# Altium PCB Pumpkin Letter Template.PcbDoc
Units mil, origin at the board's own origin, x right, y up, seen from the top; angles counter-clockwise.
Board outline 3775 x 3550 mil, 4 copper layers (TOP Copper, Inner Layer 1, Inner Layer 2, BOT Copper), stack 61.2 mil thick; 5 components, 127 nets, 128 pads, 0 vias.
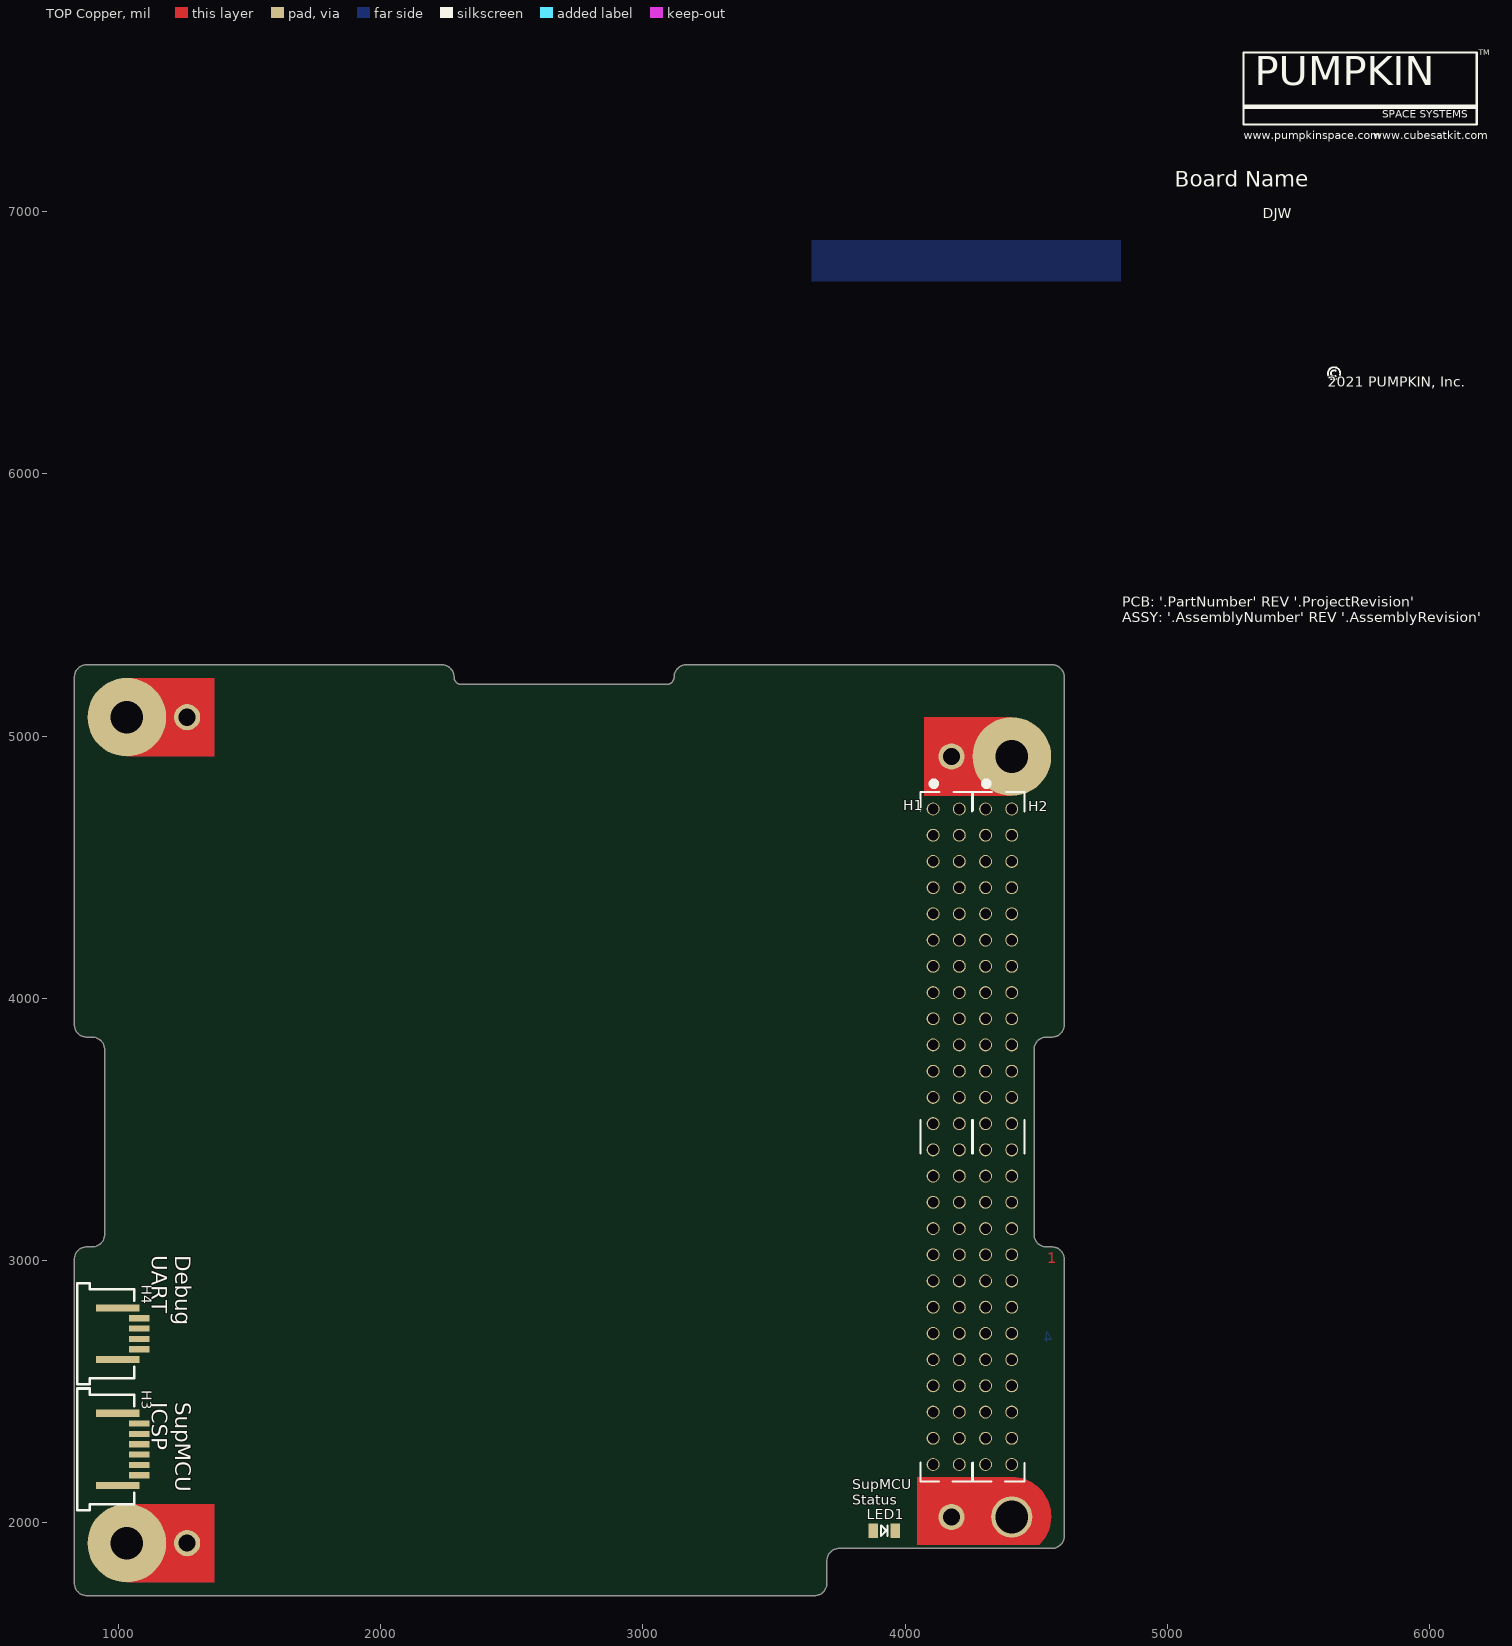
[diagram p0: TOP Copper view]
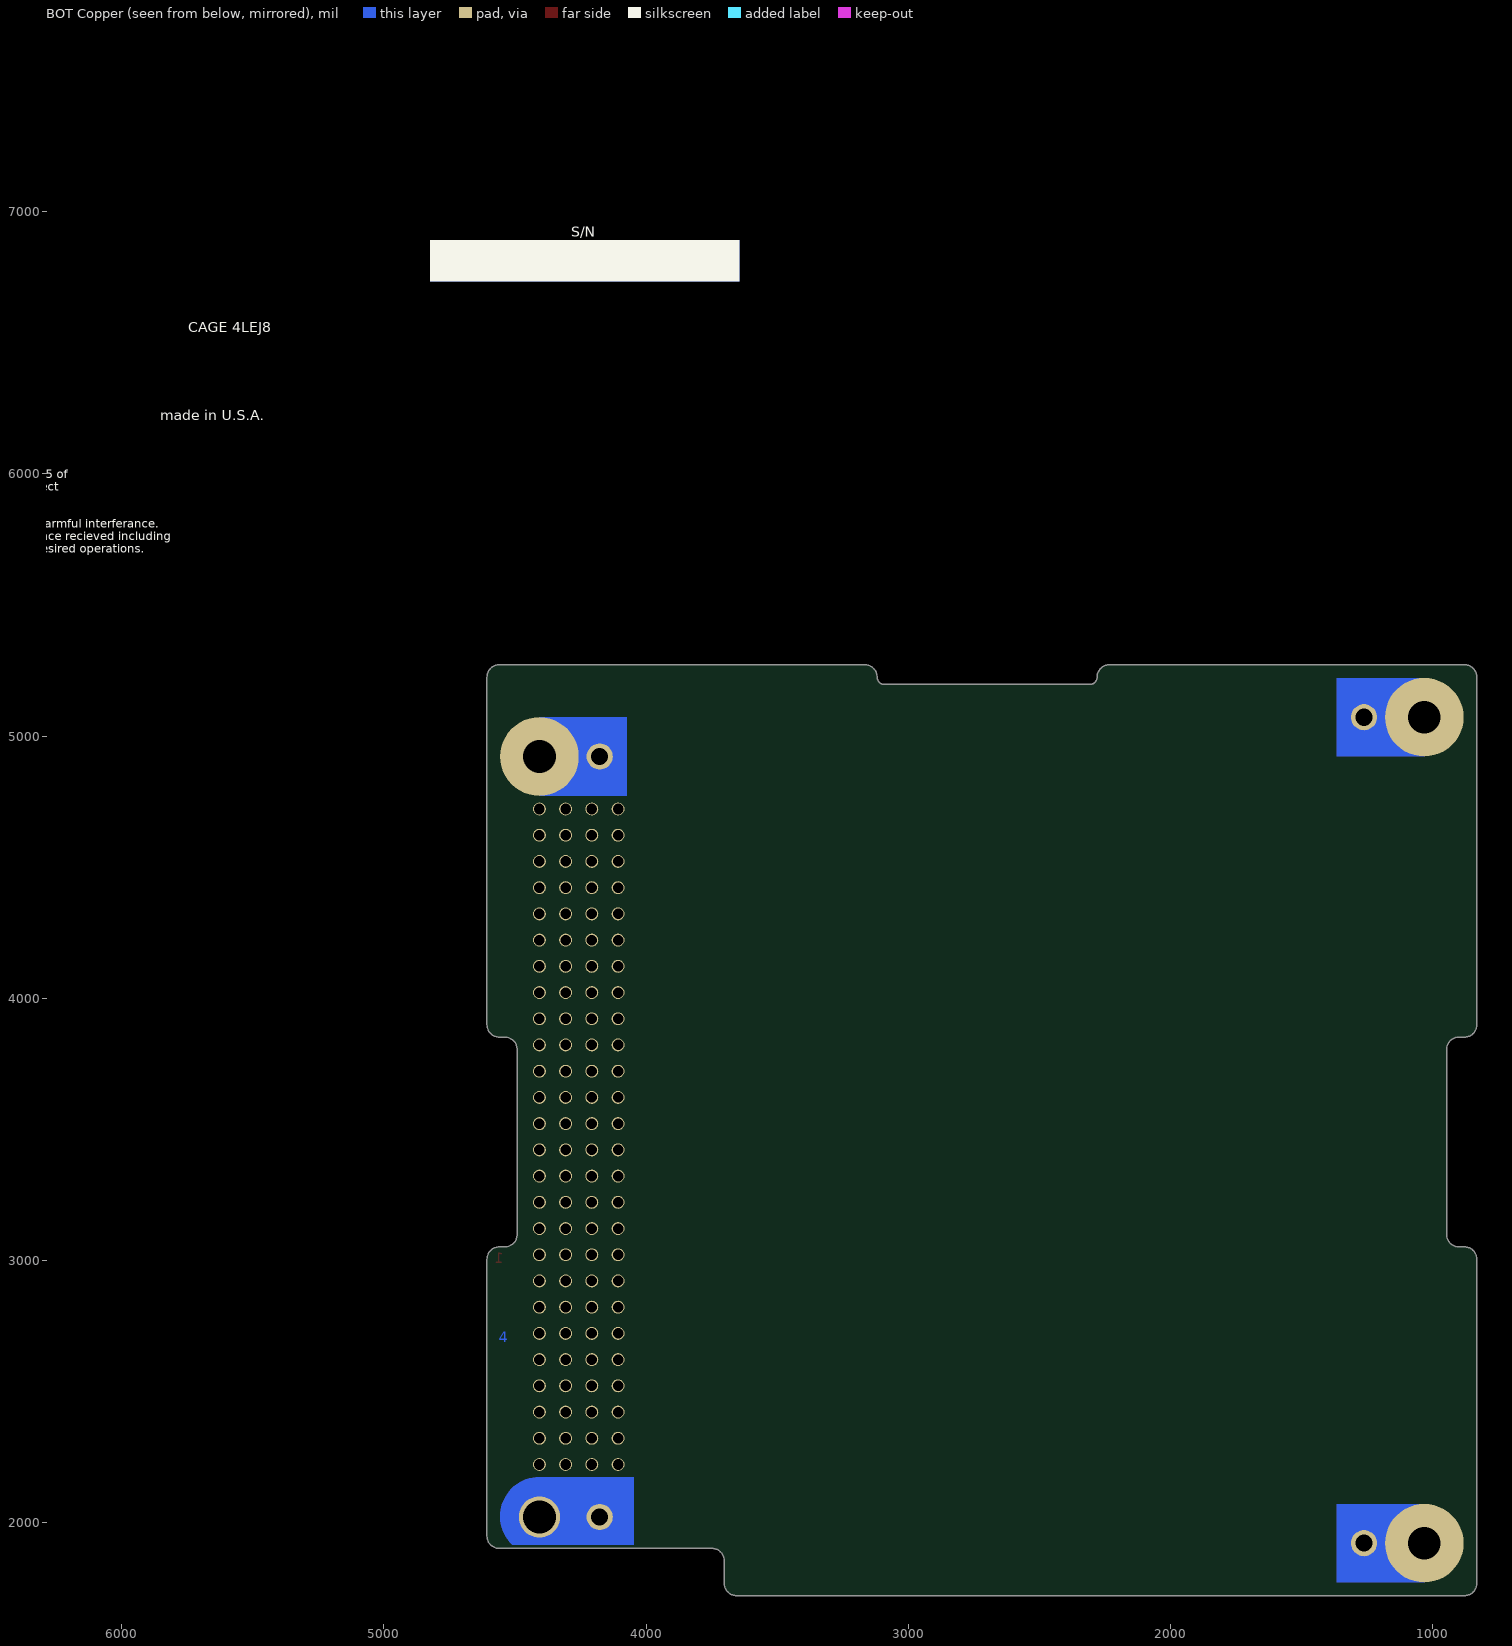
[diagram p1: BOT Copper view, seen from below]
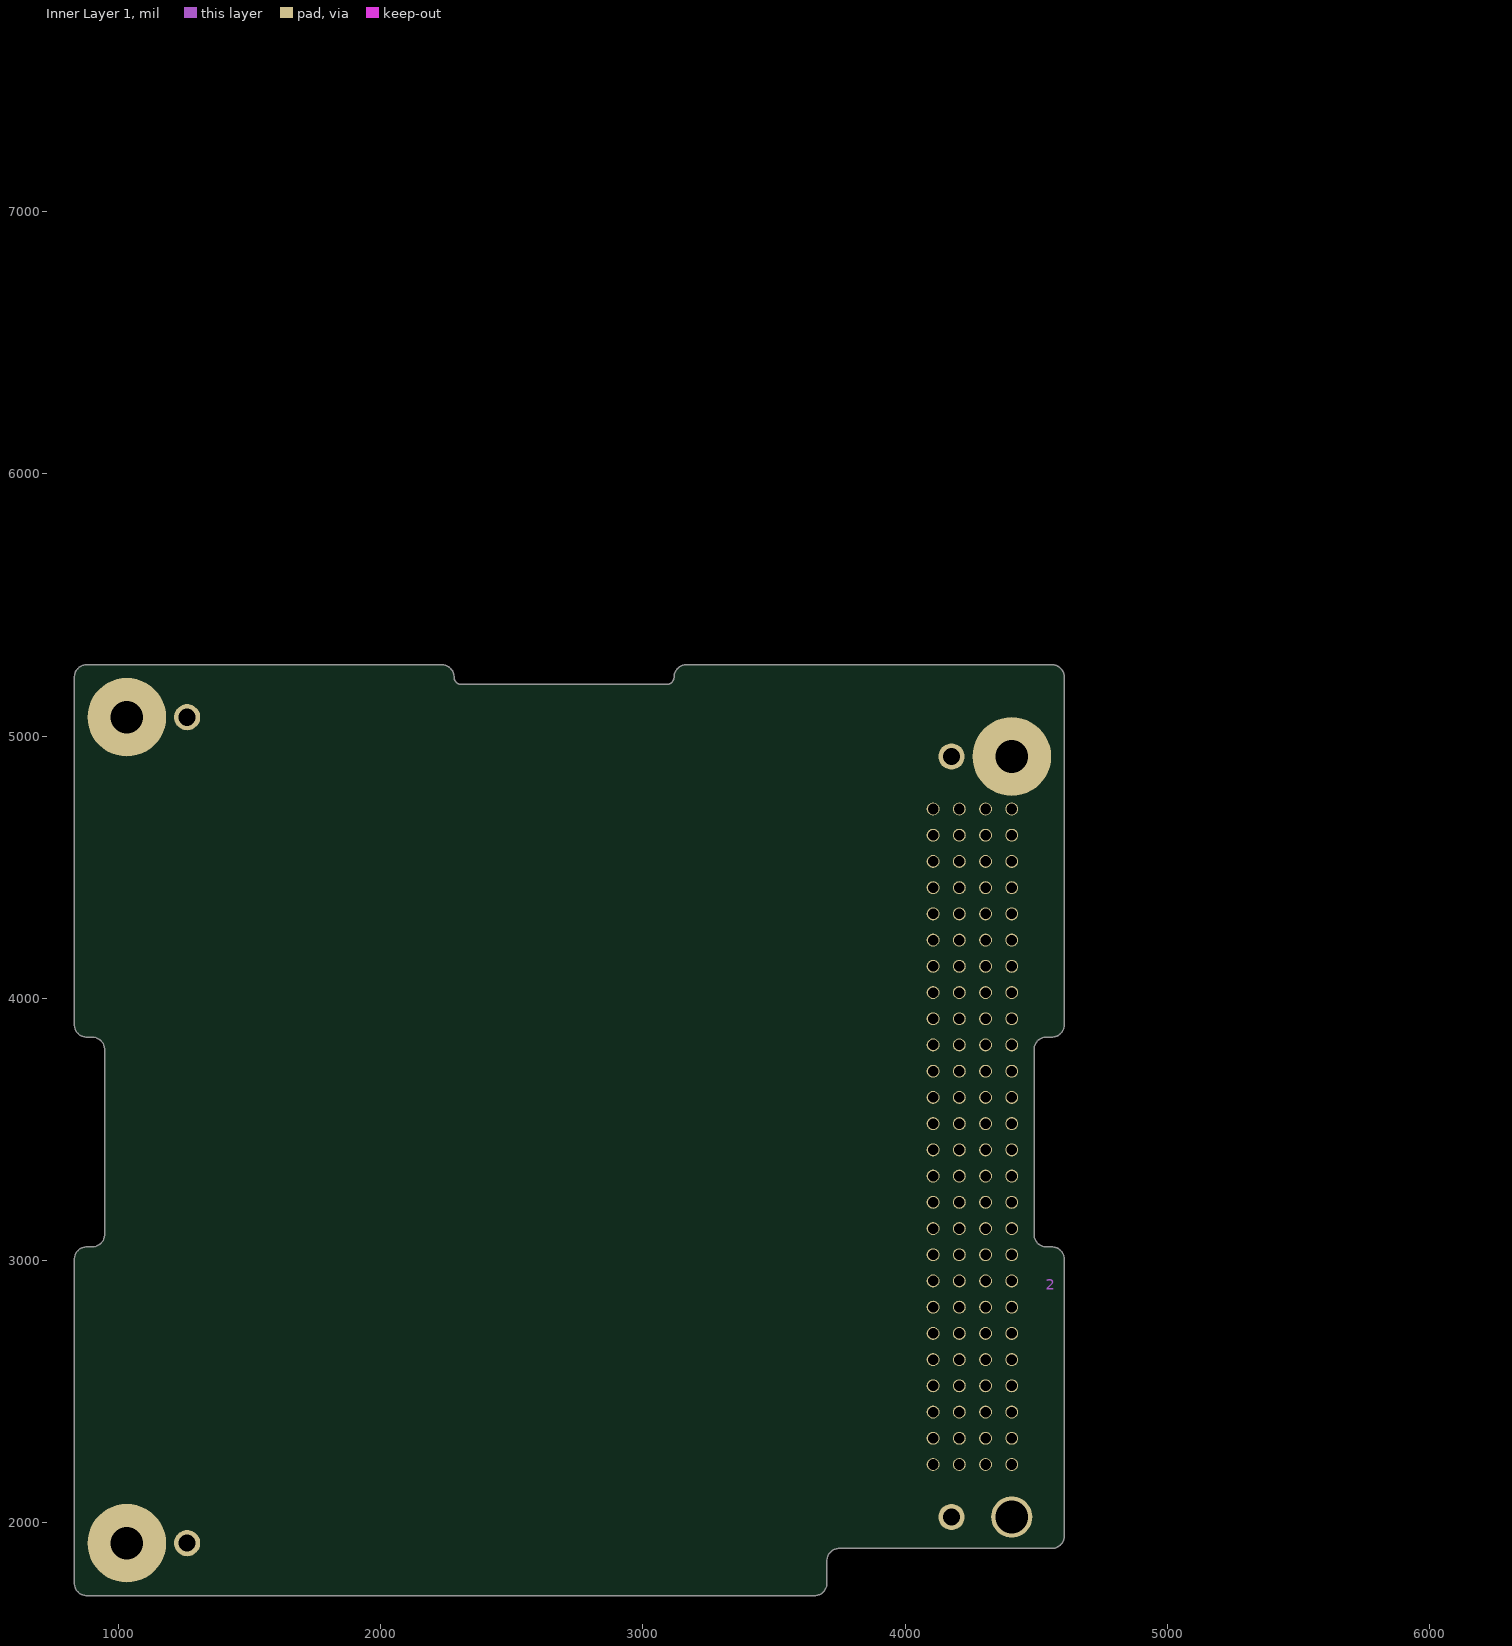
[diagram p2: Inner Layer 1]
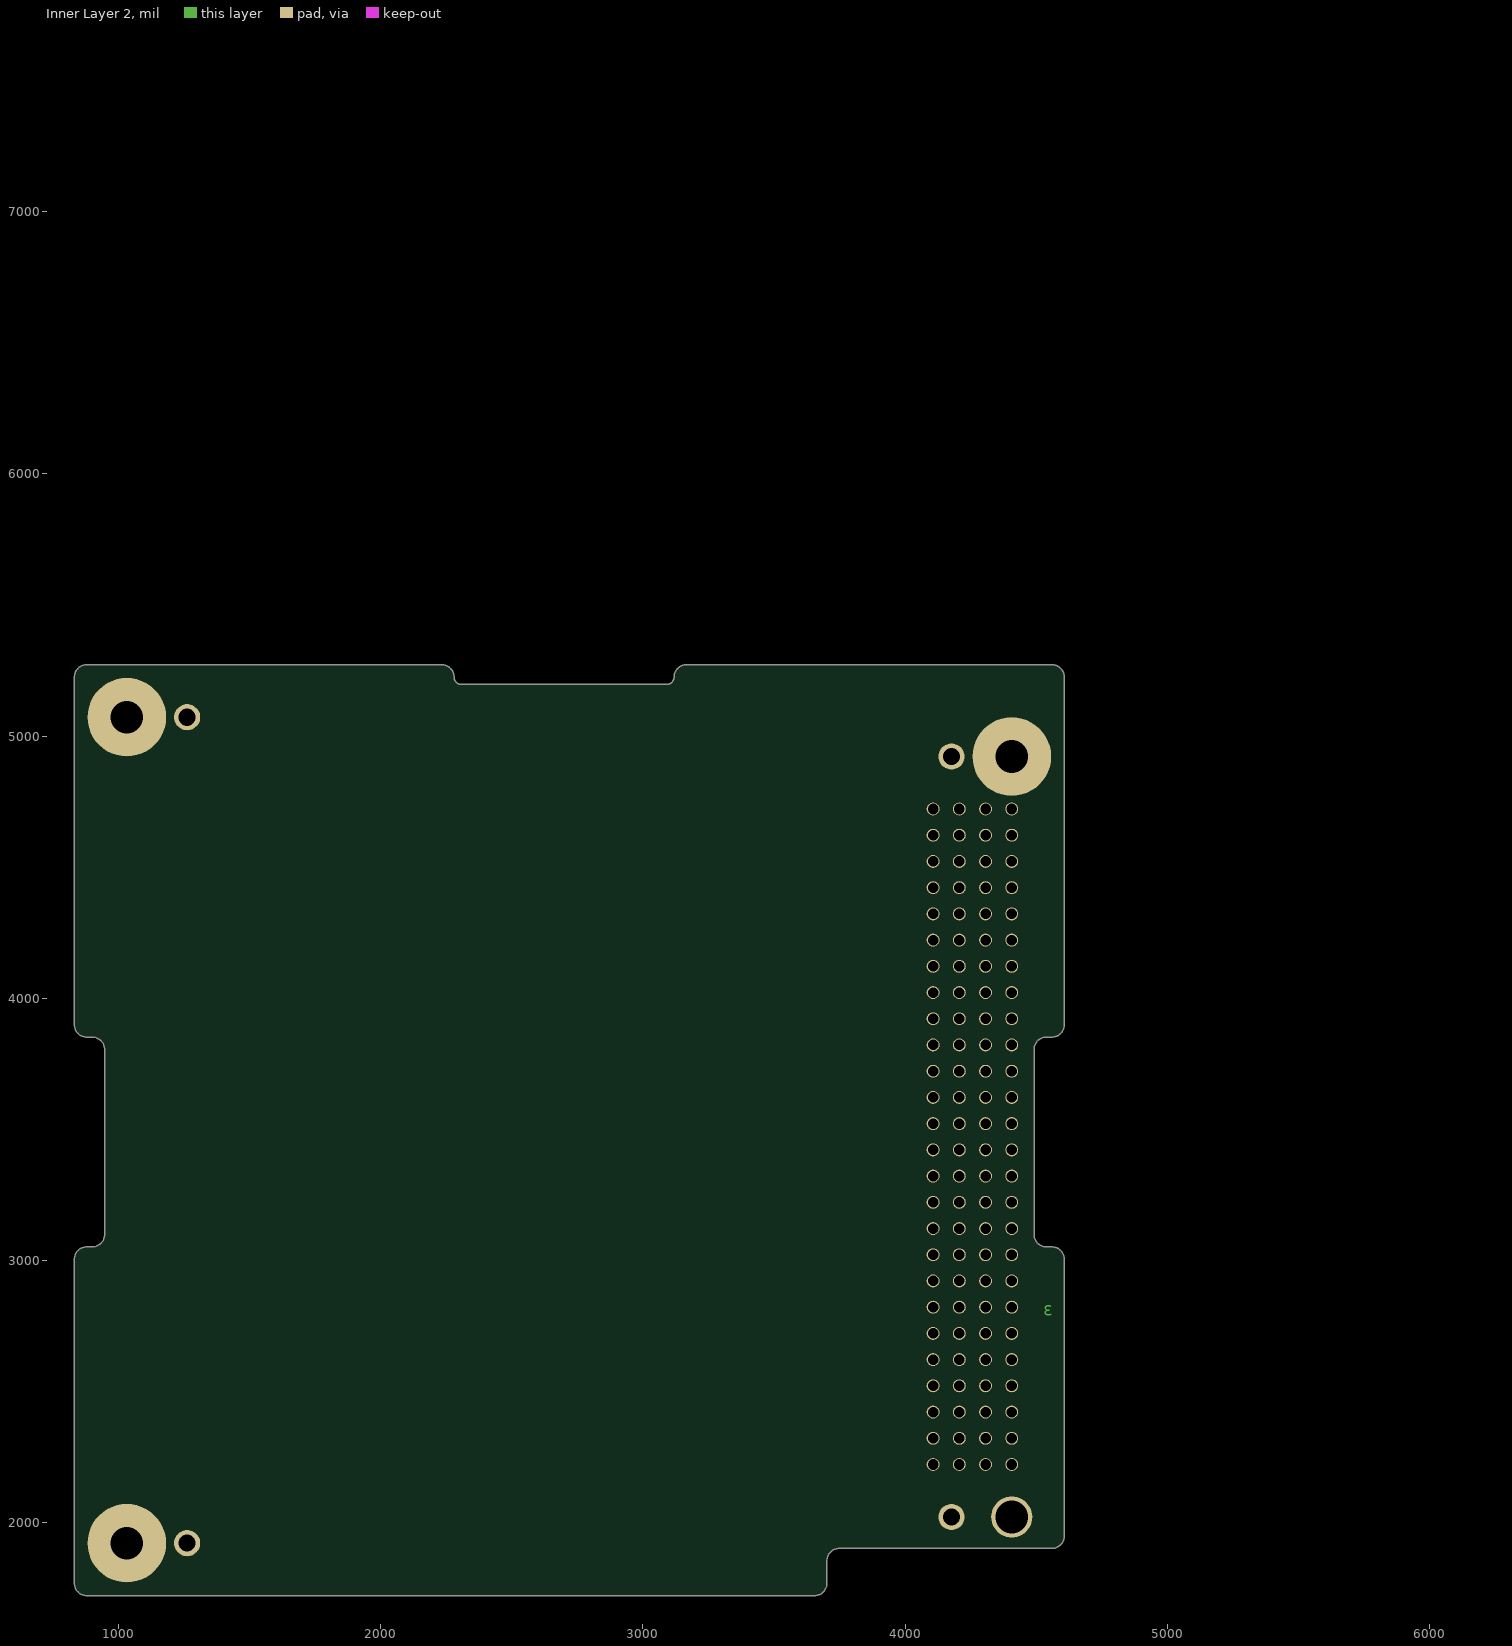
[diagram p3: Inner Layer 2]

## Layer stack, top to bottom
Top Solder: solder mask 0.4, Solder Resist, Dk 3.5
TOP Copper: signal copper 1.4
Dielectric 1: core 8, FR-4, Dk 4.8
Inner Layer 1: signal copper 1.417
Dielectric 3: prepreg 37.566, Dk 4.2
Inner Layer 2: signal copper 1.417
Dielectric 2: core 10, Dk 4.2
BOT Copper: signal copper 1.4
Bottom Solder: solder mask 0.4, Solder Resist, Dk 3.5

## Board outline
832,1769 832,3005 cw(c879,3005) 879,3052 900,3052 ccw(c900,3099) 947,3099 947,3805 ccw(c900,3805) 900,3852 879,3852 cw(c879,3899) 832,3899 832,5225 cw(c879,5225) 879,5272 2233,5272 cw(c2233,5225) 2280,5225 ccw(c2308,5225) 2308,5197 3091,5197 ccw(c3091,5225) 3119,5225 cw(c3166,5225) 3166,5272 4560,5272 cw(c4560,5225) 4607,5225 4607,3899 cw(c4560,3899) 4560,3852 4539,3852 ccw(c4539,3805) 4492,3805 4492,3099 ccw(c4539,3099) 4539,3052 4560,3052 cw(c4560,3005) 4607,3005 4607,1949 cw(c4560,1949) 4560,1902 3749,1902 ccw(c3749,1855) 3702,1855 3702,1769 cw(c3655,1769) 3655,1722 879,1722 cw(c879,1769)

## Design rules (kind name [scope] priority, off if disabled: settings)
BoardOutlineClearance [All] p1: gap=10 ignorepadtopadclearanceinfootprint=FALSE
Clearance Clearance_1 [HasFootprint('Spark_Gap') vs inPolygon] p1: gap=8 ignorepadtopadclearanceinfootprint=FALSE except(0: Arc-Hole Track-Hole SMDPad-Hole THPad-Hole Via-Hole Fill-Hole Poly-Hole Region-Hole Text-Hole)
Clearance Clearance_3 [HasFootprint('Spark_Gap')] p2: gap=6 ignorepadtopadclearanceinfootprint=FALSE except(0: Arc-Hole Track-Hole SMDPad-Hole THPad-Hole Via-Hole Fill-Hole Poly-Hole Region-Hole Text-Hole)
Clearance Clearance_2 [InNet('BAT_POS')   and not      HasFootprint('Spark_Gap')] p3: gap=8 ignorepadtopadclearanceinfootprint=FALSE except(0: Arc-Hole Track-Hole SMDPad-Hole THPad-Hole Via-Hole Fill-Hole Poly-Hole Region-Hole Text-Hole)
Clearance Polygon_Clearence [All vs OnLayer('Keep-Out Layer')] p4: gap=10 ignorepadtopadclearanceinfootprint=FALSE except(0: Arc-Hole Track-Hole SMDPad-Hole THPad-Hole Via-Hole Fill-Hole Poly-Hole Region-Hole Text-Hole)
Clearance [All] p5: gap=8 ignorepadtopadclearanceinfootprint=FALSE except(0: Arc-Hole Track-Hole SMDPad-Hole THPad-Hole Via-Hole Fill-Hole Poly-Hole Region-Hole Text-Hole)
ComponentClearance [All] p1: gap=10 collisioncheckmode=3 verticalgap=1.97 showdistances=FALSE
HoleSize [All] p1: absolutevalues=TRUE maxlimit=314.96 minlimit=1 maxpercent=80.000 minpercent=20.000
MinimumSolderMaskSliver [All] p1: minsoldermaskwidth=6
PolygonConnect PolygonConnect_1 [(InPadClass('Power'))or isVia   or HasFootprint('Spark_Gap')] p1: connectstyle=Direct reliefconductorwidth=10 reliefentries=4 polygonreliefangle="90 Angle" airgapwidth=10
PolygonConnect [All] p2: connectstyle=Relief reliefconductorwidth=10 reliefentries=4 polygonreliefangle="90 Angle" airgapwidth=7.09
RoutingVias [All] p1: holewidth=7.87 width=19.68 viastyle="Through Hole" minholewidth=5 minwidth=15.75 maxholewidth=236.22 maxwidth=314.96
SilkToSilkClearance [All] p1: silktosilkclearance=0
SilkToSolderMaskClearance [IsPad] p1: minsilkscreentomaskgap=0 clearancetoexposedcopper=TRUE
SolderMaskExpansion [All] p1: expansion=0 istentingtop=FALSE
Width [All] p1: maxlimit=100 minlimit=8 preferedwidth=10 minimp=50.000000 maximp=50.000000 favimp=50.000000
25 further rules are at their usual default settings.

## Classes and differential pairs
component class U_Battery_Module_SupMCU: c102 D9 R61
component class "U_Flight Switches": Q1 Q4

## Components (designator, comment, footprint, x,y, rotation, side; value= is the part's Value field where it differs from the comment)
H1 "CubesatBus-H1 no labels" "ESQ-126-37-G-D - bottom" 4157,3472 r270 top
H2 "CubesatBus-H2 no labels" "ESQ-126-37-G-D - bottom" 4357,3472 r270 top
H3 "SFW6R-2STE1LF" SFW6R-2STE1LF 1079.61,2279.68 r270 top (schematic designator H6)
H4 "SFW4R-2STE1LF" SFW4R-2STE1LF 1079.61,2720.62 r270 top (schematic designator H5)
LED1 "LED-O-0805" "0805 LED-ORANGE" 3920.83,1970.03 r180 top

## Footprints (in the part's own frame and the unit in brackets; to place one, negate y for a bottom-side part, rotate by r counter-clockwise, add the part's x,y. Pads: shape width x height; smd on the part's side, far side on the other; paste and mask are expansions set on the pad)
"0805 LED-ORANGE" [mm] "Chip LED, 2-Leads, Body 2.05x1.25mm, IPC Medium Density"
  rect 0.91x1.41 smd: 1(-1.07,0) 2(1.07,0)
  silkscreen extent -0.3,-0.51 0.3,0.5, body extent -1.1,-0.7 1.1,0.7, height 0.8
"ESQ-126-37-G-D - bottom" [mm] "ESQ-126-37-G-D Samtech 52-pin connector"
  round 1.25 hole 1.02: 1(-31.75,-1.27) 2(-31.75,1.27) 3(-29.21,-1.27) 4(-29.21,1.27) 5(-26.67,-1.27) 6(-26.67,1.27) 7(-24.13,-1.27) 8(-24.13,1.27) 9(-21.59,-1.27) 10(-21.59,1.27) 11(-19.05,-1.27) 12(-19.05,1.27) 13(-16.51,-1.27) 14(-16.51,1.27) 15(-13.97,-1.27) 16(-13.97,1.27) 17(-11.43,-1.27) 18(-11.43,1.27) 19(-8.89,-1.27) 20(-8.89,1.27) 21(-6.35,-1.27) 22(-6.35,1.27) 23(-3.81,-1.27) 24(-3.81,1.27) 25(-1.27,-1.27) 26(-1.27,1.27) 27(1.27,-1.27) 28(1.27,1.27) 29(3.81,-1.27) 30(3.81,1.27) 31(6.35,-1.27) 32(6.35,1.27) 33(8.89,-1.27) 34(8.89,1.27) 35(11.43,-1.27) 36(11.43,1.27) 37(13.97,-1.27) 38(13.97,1.27) 39(16.51,-1.27) 40(16.51,1.27) 41(19.05,-1.27) 42(19.05,1.27) 43(21.59,-1.27) 44(21.59,1.27) 45(24.13,-1.27) 46(24.13,1.27) 47(26.67,-1.27) 48(26.67,1.27) 49(29.21,-1.27) 50(29.21,1.27) 51(31.75,-1.27) 52(31.75,1.27)
  silkscreen extent -34.45,-2.5 33.4,2.5, body extent -33.27,-2.49 33.27,2.46, height 2.22
SFW4R-2STE1LF [mm]
  rect 0.6x2 smd mask+0.038: 1(-1.5,0) 2(-0.5,0) 3(0.5,0) 4(1.5,0)
  rect 0.7x4.2 smd mask+0.038: F(-2.5,-2.1) F(2.5,-2.1)
  silkscreen extent -4.9,-6 4.9,-0.5, body extent -4.9,-5.9 4.9,0.6, height 2.7
SFW6R-2STE1LF [mm]
  rect 0.6x2 smd mask+0.038: 1(-2.5,0) 2(-1.5,0) 3(-0.5,0) 4(0.5,0) 5(1.5,0) 6(2.5,0)
  rect 0.7x4.2 smd mask+0.038: F(-3.5,-2.1) F(3.5,-2.1)
  silkscreen extent -5.9,-6 5.9,-0.5, body extent -5.9,-5.9 5.9,0.6, height 2.7

## Part data
H1 H2: "PC/104 52-pin Header"
H3: "Flex Connector 6 pin, top side"
H4: "Flex Connector 4 pin, top side"
LED1: library part "LED ORANGE 0805", "Orange 0805 LED"

## Free pads (board coordinates)
  round 300 hole 125: ""(1032,1922) ""(1032,5072) ""(4407,4922)
  round 100 hole 65: ""(1262,1922) ""(1262,5072) ""(4177,4922) ""(4177,2022)
  round 157.48 hole 125: ""(4407,2022)

## Nets (pads, with @x,y where several pads share a name; then routed paths per layer and width w, separated by ;. In a path a pad name is that pad's centre, name@x,y a point inside that pad or via, vN(x,y) a via of type N, cw(c..) or ccw(c..) an arc to the next point about the centre after c; other vN are vias at no path point)
-MCLR: 
-MRST: 
-RESET: 
-RST: 
A\L\E\R\T\: 
BAT: 
BAT_POS: 
CELL_OV: 
CHG: 
CLK_OUT: 
D\I\S\P\: 
DBG_RXD: 
DBG_TXD: 
DSG: 
EN_I2C: 
GND: 
GPOD: 
HTR_PWR: 
LED1: 
LED2: 
LED3: 
LED4: 
LED5: 
MCU_LED: 
N_RESET: 
NEG_TERM: 
NetC1_2: 
NetC3_1: 
NetC3_2: 
NetC4_1: 
NetC5_1: 
NetC8_2: 
NetC26_2: 
NetC27_2: 
NetC28_2: 
NetC31_2: 
NetC101_2: 
NetD1_2: 
NetD6_1: 
NetD7_1: 
NetD9_1: 
NetH1_1: 
NetH1_2: 
NetH3_1: 
NetH4_1: 
NetH7_4: 
NetLED7_1: 
NetQ1_1: 
NetQ1_3: 
NetQ2_1: 
NetQ2_2: 
NetQ3_1: 
NetQ3_2: 
NetQ4_G: 
NetQ5_D: 
NetQ5_G: 
NetQ6_G: 
NetQ7_G: 
NetQ8_1: 
NetQ9_1: 
NetQ11_3: 
NetQ12_1: 
NetQ12_2: 
NetQ13_3: 
NetQ14_1: 
NetQ14_2: 
NetQ14_3: 
NetQ14_6: 
NetR13_1: 
NetR14_1: 
NetR17_1: 
NetR22_2: 
NetR37_2: 
NetR59_2: 
NetR60_2: 
NetR75_2: 
NetR76_2: 
NetR77_1: 
NetR80_1: 
NetR81_1: 
NetR95_2: 
NetTP2_1: 
NetU5_6: 
NetU7_50: 
OFF_VCC: 
ON_LED: 
P\F\I\N\: 
P\R\E\S\: 
PACK: 
PGEC1: 
PGED1: 
PMS: 
POS_TERM: 
PULLUP: 
RBI: 
REG2V5: 
REG3V3: 
SAFE: 
SCL_LOC: 
SCL_SYS: 
SDA_LOC: 
SDA_SYS: 
SMB_C: 
SMB_D: 
SMBC: 
SMBD: 
SRN: 
SRP: 
"TEMP 1": 
"TEMP 2": 
"TEMP 3": 
"TEMP 4": 
THERMAL: 
TOUT: 
TS1: 
TS2: 
U2_OUT: 
VC1: 
VC2: 
VC3: 
VC4: 
VC5: 
VCAP: 
VCC: 
VCC_MCU: 
VCELL+: 
ZVCHG: 
pads on no net: H1.1 H1.2 H1.3 H1.4 H1.5 H1.6 H1.7 H1.8 H1.9 H1.10 H1.11 H1.12 H1.13 H1.14 H1.15 H1.16 H1.17 H1.18 H1.19 H1.20 H1.21 H1.22 H1.23 H1.24 H1.25 H1.26 H1.27 H1.28 H1.29 H1.30 H1.31 H1.32 H1.33 H1.34 H1.35 H1.36 H1.37 H1.38 H1.39 H1.40 H1.41 H1.42 H1.43 H1.44 H1.45 H1.46 H1.47 H1.48 H1.49 H1.50 H1.51 H1.52 H2.1 H2.2 H2.3 H2.4 H2.5 H2.6 H2.7 H2.8 H2.9 H2.10 H2.11 H2.12 H2.13 H2.14 H2.15 H2.16 H2.17 H2.18 H2.19 H2.20 H2.21 H2.22 H2.23 H2.24 H2.25 H2.26 H2.27 H2.28 H2.29 H2.30 H2.31 H2.32 H2.33 H2.34 H2.35 H2.36 H2.37 H2.38 H2.39 H2.40 H2.41 H2.42 H2.43 H2.44 H2.45 H2.46 H2.47 H2.48 H2.49 H2.50 H2.51 H2.52 H3.1 H3.2 H3.3 H3.4 H3.5 H3.6 H3.F H4.1 H4.2 H4.3 H4.4 H4.F LED1.1 LED1.2

## Other copper
TOP Copper:
  region: 4407,5072 4072,5072 4072,4772 4407,4772
  rectangle: 1032,4922 1367,5222
  rectangle: 1032,1772 1367,2072
  region: 4047,1916 4047,2174 4407,2174 cw(c4407,2024) 4511.2,1916.1 4511,1916
  pour cut-out: 4492,3099 4492,2661.65 4607,2661.65 4607,3099
  text "1" at 4542.84,2988.69 h40
  text "Layer 1 (TOP)" at 7700,300 h196.85
Inner Layer 1:
  pour cut-out: 4492,3099 4492,2661.65 4607,2661.65 4607,3099
  text "2" at 4536.17,2888.69 h40
  text "Layer 2" at 7700,300 h196.85
Inner Layer 2:
  pour cut-out: 4492,3099 4492,2661.65 4607,2661.65 4607,3099
  text "3" at 4562.83,2788.69 h40
  text "Layer 3" at 7700,300 h196.85
BOT Copper:
  region: 4824.1,6891.48 3643,6891.48 3643,6734 4824.1,6734
  region: 4407,5072 4072,5072 4072,4772 4407,4772
  rectangle: 1032,4922 1367,5222
  rectangle: 1032,1772 1367,2072
  region: 4047,1916 4047,2174 4407,2174 cw(c4407,2024) 4511.2,1916.1 4511,1916
  pour cut-out: 4492,3099 4492,2661.65 4607,2661.65 4607,3099
  text "4" at 4562.83,2688.69 h40
  text "Layer 4 (BOTTOM)" at 7700,300 h196.85

## Silkscreen, mask and mechanical layers (free items; w line width, h text height)
Top Overlay:
  drawing of 14 lines, arcs and shapes, not listed
  text "TM" at 6188.87,7588.72 h35
  text "PUMPKIN" at 5333.49,7445.61 h190
  text "SPACE SYSTEMS" at 5820.49,7348.61 h50
  text "www.pumpkinspace.com" at 5291.49,7275.61 h30
  text "www.cubesatkit.com" at 5785.49,7275.61 h30
  text "Board Name" at 5029.36,7096.13 h60
  text "DJW" at 5363.66,6975.97 h39.37
  text "2021 PUMPKIN, Inc." at 5611.99,6331.85 h39.37
  text "PCB: '.PartNumber' REV '.ProjectRevision' / ASSY: '.AssemblyNumber' REV '.AssemblyRevision'" at 4829,5434 h39.37
  text "Debug / UART" at 1127.28,3020.53 h60 r270
  text "SupMCU / ICSP" at 1127.28,2459.62 h60 r270
  text "SupMCU / Status" at 3798.79,2068.46 h39.37
  text "Top Silkscreen" at 7700,300 h196.85
Bottom Overlay:
  region: 4824.1,6734 4824.1,6891.48 3643,6891.48 3643,6734
  text "S/N" at 4286.03,6904 h39.37
  text "CAGE 4LEJ8" at 5747,6541 h39.37
  text "made in U.S.A." at 5853.59,6203.99 h39.37
  text "This device complies with part 15 of / the FCC rules. Operation is subject / to the following conditions. /  / (1) This device may not cause harmful interferance. / (2) It must accept any interferance recieved including /     rferance that may cause undesired operations." at 7000,5700 h31.5
  text "Bottom Silkscreen" at 2800,300 h196.85
Top Paste:
  text "Top Solder Paste" at 7700,300 h196.85
Bottom Paste:
  text "Bottom Solder Paste" at 7700,300 h196.85
Top Solder:
  text "Top Soldermask" at 7700,100 h196.85
Bottom Solder:
  text "Bottom Soldermask" at 2800,100 h196.85
  text "Bottom Soldermask" at 7700,100 h196.85
Board:
  the board outline again, w10
Fab Notes:
  text "FABRICATION NOTES: / ---------------------------------------------------- / 1.  ALL DIMENSIONS IN INCHES / 2.  SCALE IS 1:1 / 4.  SMOBC BOTH SIDES. COLOR: BLUE / 5.  SOLDERMASK IS SR1020 BLUE LPI, MEETS ASTM-595E OUTGASSING REQUIREMENTS / 6.  SILKSCREEN LEGEND WHITE / 7.  SILKSCREEN TOP AND BOTTOM / 8.  FINAL BOARD THICKNESS = 0.062\" / 9.  FINAL COPPER THICKNESS = 1oz OUTER, 0.5oz INNER / 10. 4 CIRCUIT LAYERS, SYMMETRIC STACKUP / 11. MINIMUM SPACING 0.007\" / 12. MINIMUM SMD PITCH IS 0.020\" / 13. SURFACEMOUNT  COMPONENTS TOP AND BOTTOM / 14. DO NOT ADD TOOLING HOLES / 16. NUMBER OF SMD PADS: *** / 17. NUMBER OF HOLES: '.Hole_Count' / 18. SMALLEST HOLE IS 0.3mm / 19. ENTIRE BOARD TO BE IMMERSION GOLD 2 MICROINCHES /     MINIMUM OVER ELECTROLESS NICKEL 150 MICROINCHES  /     PER IPC-4552 / 20. BOARD MATERIAL:  ISOLA FR-406 / 21. BOARD DIMENSION TOLERANCE:  +0.005/-0.005 in. / 22. BOARD THICKNESS TOLERANCE:  +0.005/-0.005 in. / 23. HOLE DIAMETER TOLERANCE:  +0.003/-0.003 in." at 5168.79,2835.87 h157.48
  text "Mechanical Drawing" at 7700,300 h196.85
Rigid PCB Outline:
  the board outline again, w10
Drill Drawing:
  lines w15: 4804.64,2075.01 10439.11,2075.01 ; 4804.64,2525.01 10439.11,2525.01 ; 5355.51,1925.01 5355.51,2675.01 ; 5935.36,1925.01 5935.36,2675.01 ; 7075.03,1925.01 7075.03,2675.01 ; 7580.9,1925.01 7580.9,2675.01 ; 8314.7,1925.01 8314.7,2675.01 ; 9180.46,1925.01 9180.46,2675.01 ; 4804.64,1925.01 10439.11,1925.01 10439.11,2675.01 4804.64,2675.01 4804.64,1925.01
  text "Symbol" at 4894.64,2570.01 h72
  text "Count" at 5400.51,2570.01 h72
  text "Hole Size" at 5980.36,2570.01 h72
  text "Plated" at 7120.03,2570.01 h72
  text "Hole Type" at 7625.9,2570.01 h72
  text "Hole Length" at 8359.7,2570.01 h72
  text "Rout Path Length" at 9225.46,2570.01 h72
  text "104" at 5400.51,2420.01 h60
  text "40.16mil (1.020mm)" at 5980.36,2420.01 h60
  text "PTH" at 7120.03,2420.01 h60
  text "Round" at 7625.9,2420.01 h60
  text "-" at 8359.7,2420.01 h60
  text "-" at 9225.46,2420.01 h60
  text "P" at 4865.55,2410.02 h66.67
  text "4" at 5400.51,2270.01 h60
  text "65.00mil (1.651mm)" at 5980.36,2270.01 h60
  text "PTH" at 7120.03,2270.01 h60
  text "Round" at 7625.9,2270.01 h60
  text "-" at 8359.7,2270.01 h60
  text "-" at 9225.46,2270.01 h60
  text "S" at 4865.55,2260.02 h66.67
  text "4" at 5400.51,2120.01 h60
  text "125.00mil (3.175mm)" at 5980.36,2120.01 h60
  text "PTH" at 7120.03,2120.01 h60
  text "Round" at 7625.9,2120.01 h60
  text "-" at 8359.7,2120.01 h60
  text "-" at 9225.46,2120.01 h60
  text "T" at 4865.55,2110.02 h66.67
  text "112 Total" at 5400.51,1970.01 h60
  text "Drill Drawing" at 7700,100 h196.85
Title Block:
  lines w8: 5190.49,396.61 6080.49,396.61 ; 5190.49,404.61 6080.49,404.61 ; 5190.49,332.61 6080.49,332.61 6080.49,607.61 5190.49,607.61 5190.49,332.61
  lines w10: 6300,0 6300,800 10500,800 ; 6300,500 10500,500 ; 7500,0 7500,800 ; 0,0 0,8000 10500,8000 10500,0 0,0
  text "Part Number" at 6400,600 h196.85
  text "'.PartNumber''.ProjectRevision'" at 7700,600 h196.85
  text "TM" at 6088.87,588.72 h35
  text "PUMPKIN" at 5233.49,445.61 h190
  text "SPACE SYSTEMS" at 5720.49,348.61 h50
  text "Layers:" at 6400,300 h196.85
  text "www.pumpkinspace.com" at 5191.49,275.61 h30
  text "www.cubesatkit.com" at 5685.49,275.61 h30
Title Block Flipped:
  lines w8: 4419.51,396.61 5309.51,396.61 ; 4419.51,404.61 5309.51,404.61 ; 4419.51,332.61 5309.51,332.61 5309.51,607.61 4419.51,607.61 4419.51,332.61
  lines w10: 0,500 4200,500 ; 0,800 4200,800 4200,0 ; 3000,0 3000,800 ; 0,0 0,8000 10500,8000 10500,0 0,0
  text "'.PartNumber''.ProjectRevision'" at 2800,600 h196.85
  text "Part Number" at 4100,600 h196.85
  text "TM" at 4411.13,588.72 h35
  text "PUMPKIN" at 5266.51,445.61 h190
  text "SPACE SYSTEMS" at 4779.51,348.61 h50
  text "Layers:" at 4100,300 h196.85
  text "www.cubesatkit.com" at 4814.51,275.61 h30
  text "www.pumpkinspace.com" at 5308.51,275.61 h30

## Dimensions
879,5272 to 879,1722 on Fab Notes
832,1769 to 4607,1949 on Fab Notes